# Altium PCB PCB1.PcbDoc
Units mil, origin at the board's own origin, x right, y up, seen from the top; angles counter-clockwise.
Board outline 3070.03 x 2140.03 mil, 2 copper layers (Top Layer, Bottom Layer); 35 components, 33 nets, 154 pads, 26 vias.
Unrouted connection lines stored in the file: 1.
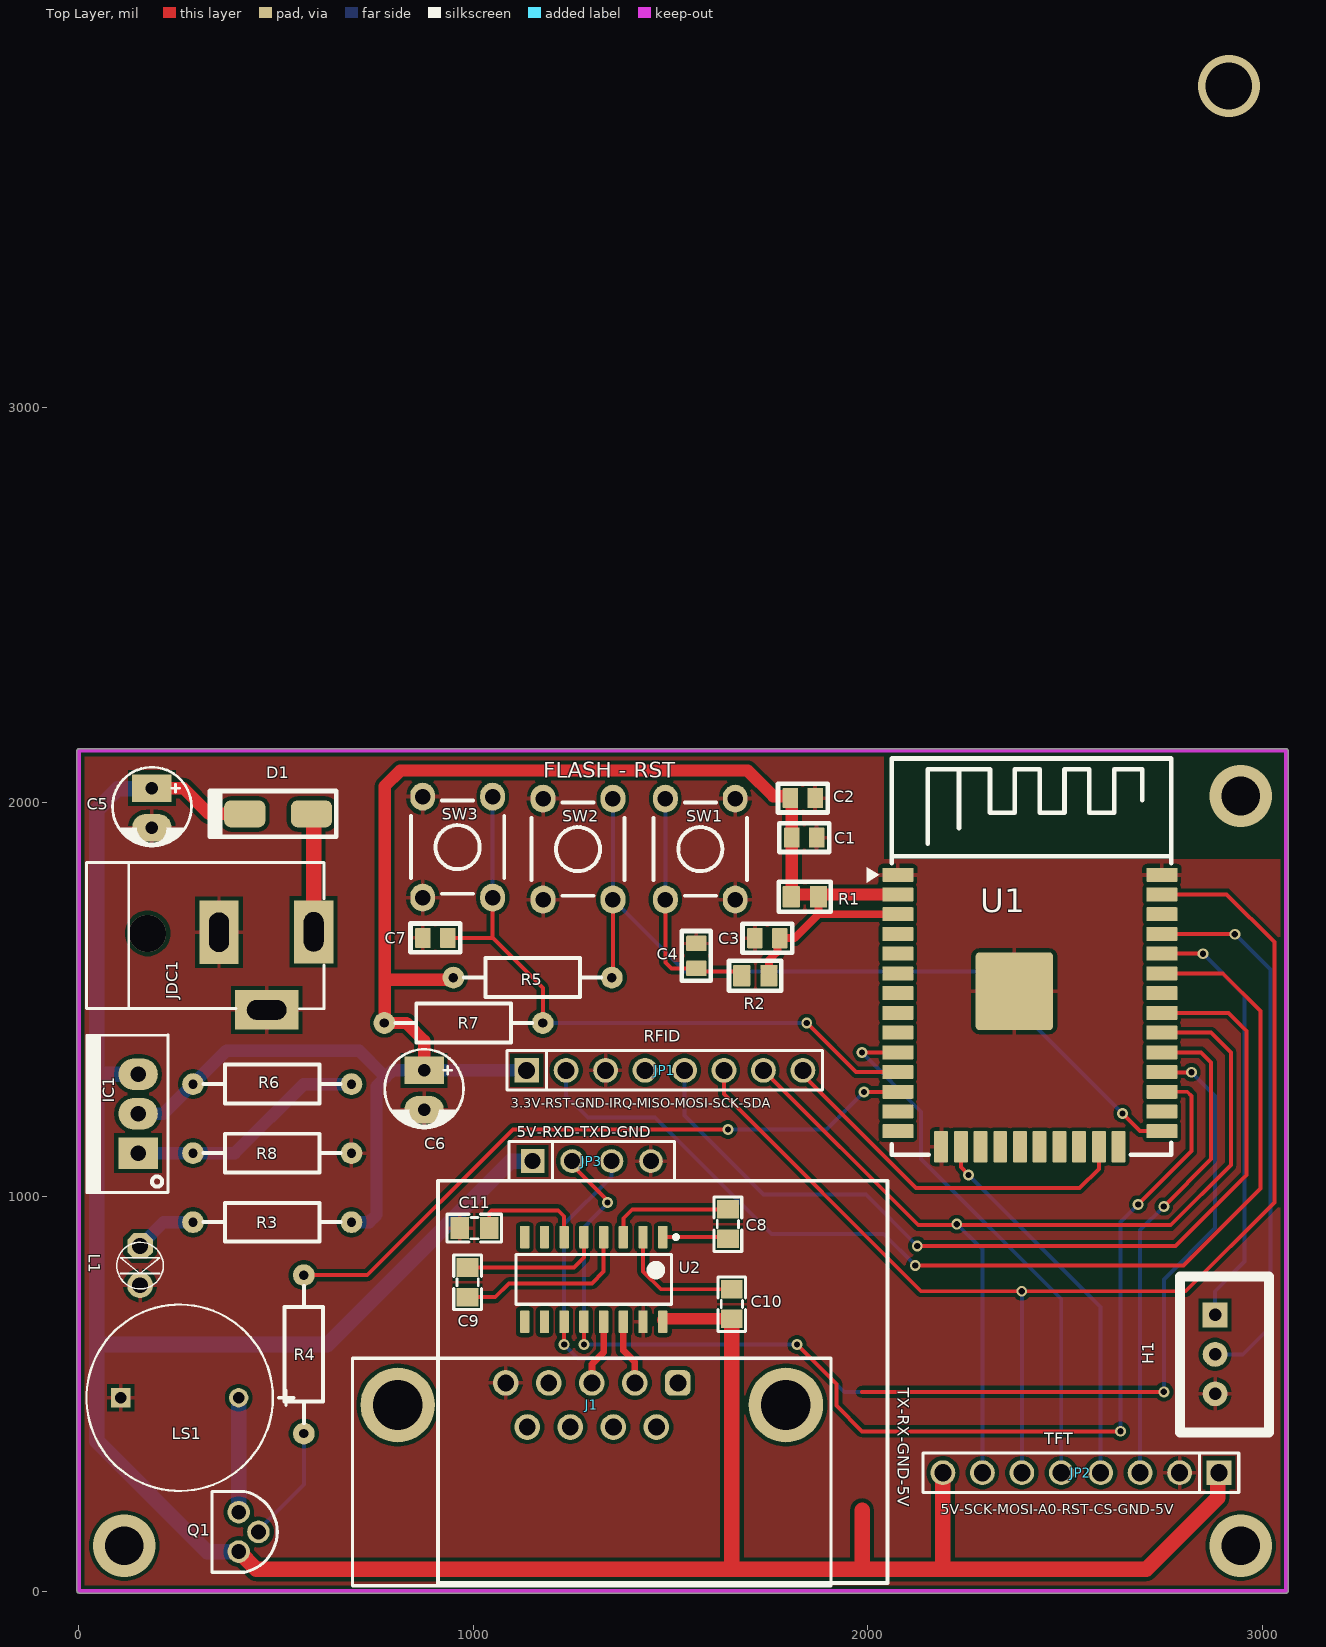
[diagram p0: Top Layer view]
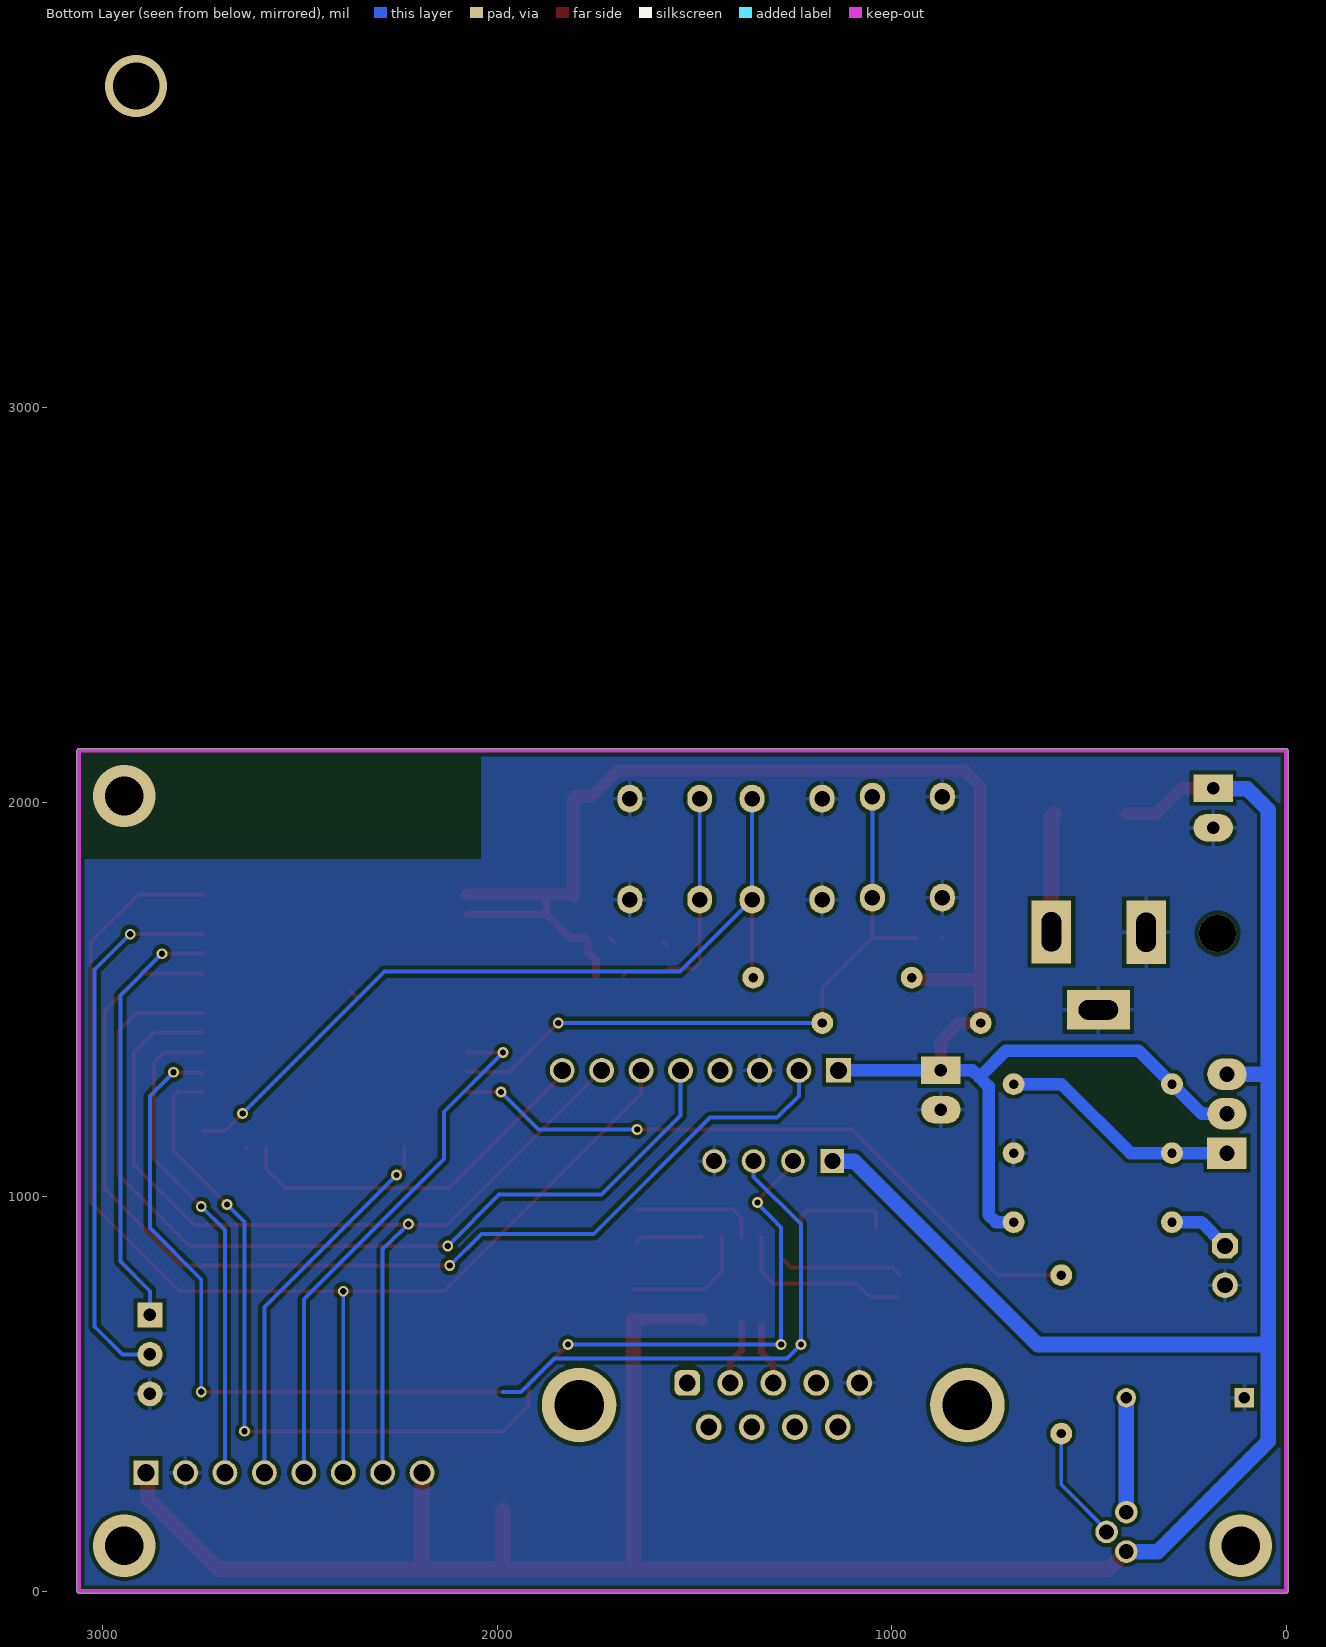
[diagram p1: Bottom Layer view, seen from below]
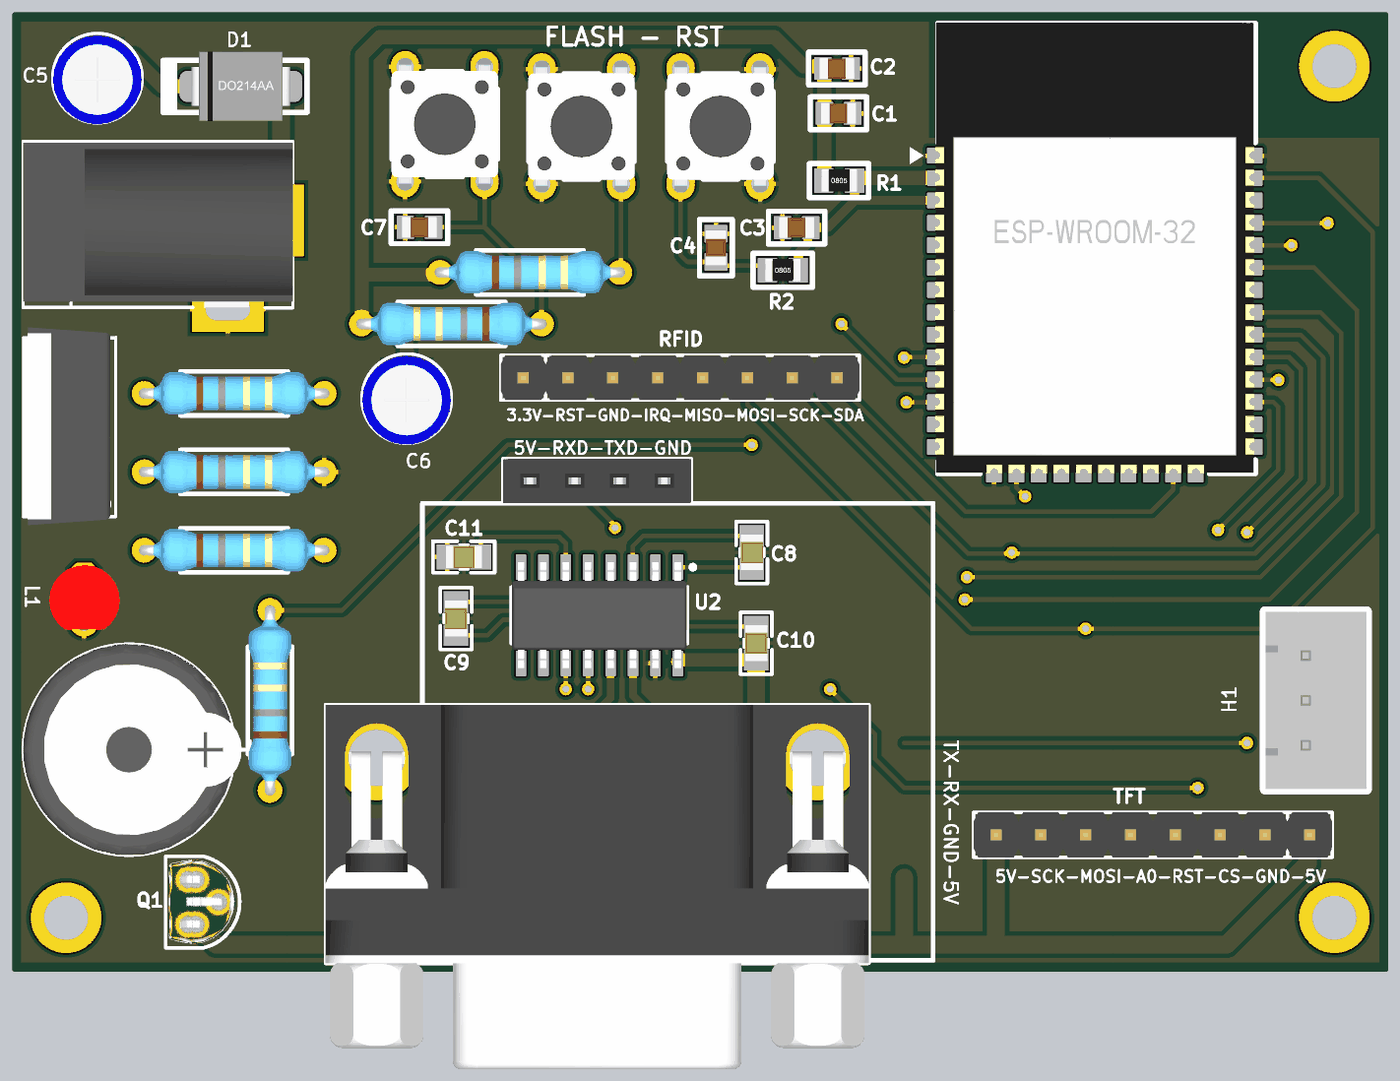
[diagram p2: 3D render of the assembled board from above, using the file's embedded part models]

## Layer stack, top to bottom
Top Solder: solder mask 0.4, Solder Resist, Dk 3.5
Top Layer: signal copper 1.4
Dielectric 1: dielectric 12.6, FR-4, Dk 4.8
Bottom Layer: signal copper 1.4
Bottom Solder: solder mask 0.4, Solder Resist, Dk 3.5

## Board outline
-5.01,0 -5.02,2130 cw(c0,2130) 0,2135.02 3060,2135.02 cw(c3060,2130) 3065.02,2130 3065.02,0 cw(c3060,0) 3060,-5.01 0,-5.01 cw(c0,0)

## Design rules (kind name [scope] priority, off if disabled: settings)
Clearance [All] p1: gap=10 ignorepadtopadclearanceinfootprint=FALSE
PolygonConnect [All] p1: connectstyle=Relief reliefconductorwidth=10 reliefentries=4 polygonreliefangle="90 Angle" airgapwidth=10
RoutingVias [All] p1: holewidth=28 width=50 viastyle="Through Hole" minholewidth=28 minwidth=50 maxholewidth=28 maxwidth=50
SolderMaskExpansion [All] p1: expansion=4 istentingtop=FALSE
SupplyNets "Schematic Supply Nets_4" [InNet('GND')] p1: voltage=0.000
SupplyNets "Schematic Supply Nets_1" [InNet('5V')] p2: voltage=0.000
SupplyNets "Schematic Supply Nets" [InNet('3.3V')] p3: voltage=0.000
Width [All] p1: maxlimit=10 minlimit=10 preferedwidth=10
30 further rules are at their usual default settings.

## Components (designator, comment, footprint, x,y, rotation, side; value= is the part's Value field where it differs from the comment)
C1 "22uF/25V/C0805/10%" CAP_CERA_C2012(CC0805INCH) 1838.5,1910 r180 top
C2 "0.1uF/25V/C0805/10%" CAP_CERA_C2012(CC0805INCH) 1835,2010 r180 top
C3 "4.7uF/25V/C0805/10%" CAP_CERA_C2012(CC0805INCH) 1745,1655 r0 top
C4 "10uF/25V/C0805/10%" CAP_CERA_C2012(CC0805INCH) 1565,1610 r90 top
C5 "0.1uF" CP1/2 185,2035 r270 top value=10uF/50V
C6 "1uF" CP1/2 875,1320 r270 top value=10uF/50V
C7 "10uF/25V/C0805/10%" CAP_CERA_C2012(CC0805INCH) 903.5,1655.63 r180 top
C8 "104" "tu 0805" 1645,930 r90 top
C9 "104" "tu 0805" 985.13,782.77 r270 top
C10 "104" "tu 0805" 1654.87,727.43 r90 top
C11 "104" "tu 0805" 1002.43,920.13 r0 top
D1 "SS34" SS14 505,1970 r180 top
H1 "Header 3P 2.54" XH2.54M-3 2880,700 r270 top
IC1 "LM317" QTO-220 150,1110 r90 top
J1 "618009231321" 618009231321 1300,300 r0 top
JDC1 "Jac DC 5V" DC-IN 595,1671 r0 top value="Jac DC"
JP1 "JP 1x8 2.54" "JP 1x8 DT" 1135,1320 r0 top
JP2 "JP 1x8 2.54" "JP 1x8 DT" 2890,300 r180 top
JP3 "JP 1x4 2.54" "JP 1x4 CT" 1150,1090 r0 top
L1 "LED 3mm" LED-3MM-RED 155,875 r270 top
LS1 "Buzzer 12095" FP-MCKPX-G1203A-K4056-MFG 255.39,490 r0 top
Q1 "SS8050DBU" FP-135AN-MFG 419.96,150 r180 top
R1 "10K/R0805/1%" "Res 0805 SMD" 1840,1760 r0 top
R2 "0k/R0805/1%" "Res 0805 SMD" 1714.45,1560 r0 top
R3 "220R" "tro vach 1/4w" 490,935 r180 top
R4 "220R" "tro vach 1/4w" 570,600 r270 top
R5 "10K" "tro vach 1/4w" 1150,1555 r180 top
R6 "330R" "tro vach 1/4w" 490,1285 r180 top
R7 "10K" "tro vach 1/4w" 975,1440 r0 top
R8 "560R" "tro vach 1/4w" 490,1110 r180 top
SW1 "Button" SW/4/06MM 1575,1880.63 r180 top
SW2 "Button" SW/4/06MM 1265,1880.63 r180 top
SW3 "Button" SW/4/06MM 960,1885.63 r0 top
U1 "ESP-WROOM-32" "ESP32 WROOM" 2075.71,1815.63 r0 top
U2 "MAX3232" D0016A_N 1305,790 r270 top

## Footprints (in the part's own frame and the unit in brackets; to place one, negate y for a bottom-side part, rotate by r counter-clockwise, add the part's x,y. Pads: shape width x height; smd on the part's side, far side on the other; paste and mask are expansions set on the pad)
618009231321 [mm] "9 pins, right angled, 10.3mm, with hex screw"
  rrect50% 1.65x1.65 hole 1.09: 1(5.54,5.78)
  round 1.65 hole 1.09: 2(2.77,5.78) 3(0,5.78) 4(-2.77,5.78) 5(-5.54,5.78) 6(4.155,2.94) 7(1.385,2.94) 8(-1.385,2.94) 9(-4.155,2.94)
  round 4.8 hole 3.2: M1(-12.495,4.36) M2(12.495,4.36)
  silkscreen extent -15.4,-7.28 15.4,7.37, body extent -15.41,-13.28 15.41,7.37, height 12.57
CAP_CERA_C2012(CC0805INCH) [mm] "Chip Capacitor, 2-Leads, Body 2.0x1.3mm, IPC Medium Density"
  rrect10% 1x1.3 smd: 1(-0.8,0) 2(0.8,0)
  silkscreen extent -1.6,-0.93 1.6,0.93, body extent -1,-0.6 1,0.6, height 0.95
CP1/2 [mil] "Tu hoa < 22uF/16>50V"
  rect 70x100 hole 32: 1(0,0)
  oval 70x100 hole 32: 2(100,0)
  silkscreen extent -53,-100 146,100, body extent -49,-99 149,99, height 287
D0016A_N [mm] "SOIC, 16-Leads, Body 10x4mm, Pitch 1.27mm, IPC Medium Density"
  rrect17% 1.45x0.6 smd: 1(-2.725,4.445) 2(-2.725,3.175) 3(-2.725,1.905) 4(-2.725,0.635) 5(-2.725,-0.635) 6(-2.725,-1.905) 7(-2.725,-3.175) 8(-2.725,-4.445) 9(2.725,-4.445) 10(2.725,-3.175) 11(2.725,-1.905) 12(2.725,-0.635) 13(2.725,0.635) 14(2.725,1.905) 15(2.725,3.175) 16(2.725,4.445)
  silkscreen extent -2.85,-5 1.6,5.42, body extent -3,-4.95 3,4.95, height 1.59
DC-IN [mil] "Jac DC input"
  rect 100x160 hole 50 slot 100 at 90 deg: 1(0,0) 2(-240,-1)
  rect 160x100 hole 50 slot 100 at 0 deg: 3(-119,-198)
  silkscreen extent -576,-195 26,176, body extent -576,-195 26,173, height 434
"ESP32 WROOM" [mm] "ESP32 WROOM"
  rrect10% 2x0.9 smd: 1(0,0) 2(0,-1.27) 3(0,-2.54) 4(0,-3.81) 5(0,-5.08) 6(0,-6.35) 7(0,-7.62) 8(0,-8.89) 9(0,-10.16) 10(0,-11.43) 11(0,-12.7) 12(0,-13.97) 13(0,-15.24) 14(0,-16.51) 25(17,-16.51) 26(17,-15.24) 27(17,-13.97) 28(17,-12.7) 29(17,-11.43) 30(17,-10.16) 31(17,-8.89) 32(17,-7.62) 33(17,-6.35) 34(17,-5.08) 35(17,-3.81) 36(17,-2.54) 37(17,-1.27) 38(17,0)
  rrect10% 0.9x2 smd: 15(2.785,-17.51) 16(4.055,-17.51) 17(5.325,-17.51) 18(6.595,-17.51) 19(7.865,-17.51) 20(9.135,-17.51) 21(10.405,-17.51) 22(11.675,-17.51) 23(12.945,-17.51) 24(14.215,-17.51)
  rrect10% 5x5 smd: 39(7.5,-7.5)
  silkscreen extent -2,-18.02 17.6,7.49, body extent -0.54,-18.02 17.54,7.52, height 3
FP-135AN-MFG [mm]
  round 1.45 hole 0.95 paste-2539.97 mask+0: 1(0.38,-1.27) 2(-0.89,0) 3(0.38,1.27)
  silkscreen extent -2.1,-2.6 2.1,2.6, body extent -2.19,-2.7 2.19,2.7, height 0.25
FP-MCKPX-G1203A-K4056-MFG [mm]
  rect 1.25x1.25 hole 0.75 paste-2539.97 mask+0: 1(-3.8,0)
  round 1.25 hole 0.75 paste-2539.97 mask+0: 2(3.8,0)
  silkscreen extent -6,-6 7.35,6, body extent -6.1,-6.1 6.1,6.1, height 0.25
"JP 1x4 CT" [mm]
  rect 1.52x1.52 hole 1.02: 1(0,0)
  round 1.52 hole 1.02: 2(2.54,0) 3(5.08,0) 4(7.62,0)
  silkscreen extent -1.52,-1.27 9.14,1.27, body extent -1.52,-1.25 9.14,1.25, height 8.51
"JP 1x8 DT" [mm] "8 pins, 1 row, straight, gold plating"
  rect 1.6x1.6 hole 1.1: 1(0,0)
  round 1.6 hole 1.1: 2(2.54,0) 3(5.08,0) 4(7.62,0) 5(10.16,0) 6(12.7,0) 7(15.24,0) 8(17.78,0)
  silkscreen extent -1.27,-1.27 19.05,1.27, body extent -1.27,-1.27 19.05,1.27, height 8.54
LED-3MM-RED [mil]
  oct 65x65 hole 40: 1(0,0)
  round 65 hole 40: 2(100,0)
  silkscreen extent -9,-59 109,59, body extent -27,-77 117,80, height 181
QTO-220 [mil] "TO-220 - 1-2-3"
  rect 80x100 hole 39: 1(0,0)
  oval 80x100 hole 39: 2(100,0) 3(200,0)
  silkscreen extent -100,-76 300,130, body extent -119,-64 322,121, height 755
"Res 0805 SMD" [mm] "Reflow Soldering"
  rrect10% 1.1x1.4 smd mask+0.1: 1(-0.875,0) 2(0.875,0)
  silkscreen extent -1.69,-0.97 1.67,0.96, body extent -1,-0.63 1,0.63, height 0.62
SS14 [mm] "Diode SMD"
  rrect50% 2.65x1.75 smd: 1(-2.15,0) 2(2.15,0)
  silkscreen extent -3.75,-1.48 4.4,1.48, body extent -2.79,-1.98 2.79,1.97, height 2.6
SW/4/06MM [mm]
  oval 1.6x1.8 hole 1: 1(-2.25,3.25) 2(-2.25,-3.25) 3(2.25,-3.25) 4(2.25,3.25)
  silkscreen extent -3,-3 3,3, body extent -3.01,-3.87 3.02,3.87, height 5.01
"tro vach 1/4w" [mm]
  round 1.4 hole 0.6: 1(-5.1,0) 2(5.1,0)
  silkscreen extent -4.39,-1.25 4.42,1.25, body extent -5.38,-1.2 5.38,1.2, height 2.41
"tu 0805" [mm] "Compoment SMD 80x50mil"
  rect 1.2x1.4 smd: 1(-0.946,-0.003) 2(0.954,-0.003)
  silkscreen extent -1.75,-0.89 1.75,0.89, body extent -1.01,-0.64 1.01,0.63, height 0.61
XH2.54M-3 [mm]
  rect 1.6x1.6 hole 0.8: 1(0,0)
  round 1.6 hole 0.8: 2(2.54,0) 3(5.08,0)
  silkscreen extent -2.48,-2.26 7.56,3.46, body extent -2.48,-2.26 7.56,3.48, height 6.91

## Part data
C1: library part 0.1uF/50V/C0603/10%, "22µF ±20% 25V Ceramic Capacitor X5R 0805 (2012 Metric)", Manufacturer="Tariff Applied", ComponentLink1Description=http://www.murata.com/~/media/webrenewal/support/library/catalog/products/capacitor/mlcc/c02e.ashx, ComponentLink1URL=http://www.murata.com/~/media/webrenewal/support/library/catalog/products/capacitor/mlcc/c02e.ashx, Digikey=1276-2908-1-ND
C2 C3 C4 C7: library part 0.1uF/50V/C0603/10%, "0.1µF ±10% 25V Ceramic Capacitor X7R 0805 (2012 Metric)", ComponentLink1Description=http://www.murata.com/~/media/webrenewal/support/library/catalog/products/capacitor/mlcc/c02e.ashx, ComponentLink1URL=http://www.murata.com/~/media/webrenewal/support/library/catalog/products/capacitor/mlcc/c02e.ashx, Digikey=478-3755-1-ND
C5 C6: library part CP1, "Cap P  0,1uF < 22uF , 16 - 50V", Description 1="10 => 220uF/6,3V/10V - 10uF => 100uF/16V", Description 2="0,1uF => 33uF/50V - 10uF => 22uF/63V", Description 3="0,47uF => 10uF/100V"
C8 C9 C10 C11: library part "Tu 0805 104 50V 10%", "Dán", Chung_Loai=Dán, Don_Vi=Con, Ma_Hang=MH004551, So_Chan=2, Ten_Linh_Kien="Tụ 0805 104-100nF 10% 50V"
D1: library part "D Schottky", "Schottky Diode", Code_JEDEC=DO-214-AA, LatestRevisionDate=17-Jul-2002, LatestRevisionNote="Re-released for DXP Platform.", PackageDescription="DO-214-AA/SMB; 2 C-Bend Leads; Body 5.3 x 3.6 mm, inc. leads (LxW)", PackageReference=SMB, Published=8-Jun-2000, Publisher="Altium Limited"
H1: library part "Header 3P 2.54 Duc Thang", "Cắm", Chung_Loai=Cắm, Don_Vi=Con, Ma_Hang=MH001292, Ten_Linh_Kien="Header 3P XH2.54-3P Đực Thẳng"
IC1: "Adj Voltage +1.2 -> +37V"
J1: library part CMP-1502-00204-2, Contact Resistance=30mΩ, Current Rating=3A, Insulation Resistance=5GΩ, Max Operating Temperature=105°C, Min Operating Temperature=-55°C, Operating Supply Voltage=125V, Contact Plating=Gold, Depth=20.75mm, Gender=Female, Housing Material=Steel, Insulation Material=PBT, Lead Free="Lead Free", Length=16.34mm, Mount="Through Hole", NexarPartId=12259390, Number of Contacts=9, Number of Pins=9, Number of Rows=2, Orientation="Right Angle", Pitch=2.77mm, REACH SVHC=Unknown, RoHS=Compliant, Termination=SMD/SMT, Voltage Rating=125V, Width=12.5mm
JDC1: library part DCIN, "Jac DC input"
JP1 JP2: library part "JP 1x8 2.54 Duc Thang", "Cắm", Chung_Loai=Cắm, Don_Vi=Con, Ma_Hang=MH000903, Ten_Linh_Kien="Jump Đơn Đực 2.54MM 1x40P Thẳng 11MM"
JP3: library part "JP 1x4 2.54 Cai Thang", "Cắm", Chung_Loai=Cắm, Don_Vi=Con, Ma_Hang=MH004006, Ten_Linh_Kien="Jump Đơn Cái 2.54MM 1x20P Thẳng"
L1: library part "LED 3mm Do", "Cắm", Chung_Loai=Cắm, Don_Vi=Con, Ma_Hang=MH003892, Ten_Linh_Kien="Led 3MM Phủ Đỏ (10c)"
LS1: library part CMP-12433-000001-1, "MAGNETIC BUZZER AND TRANSDUCER - More Details", Current=30mA, Frequency=2300Hz, Manufacturer="Multicomp Pro", Manufacturer Part Number=MCKPX-G1203A-K4056, Max Supply Voltage=5V, Min Supply Voltage=2V, Operating Supply Voltage=3V, PACKAGE=0, Temperature="-20°C to +70°C", Temperature Range High=+70°C, Temperature Range Low=-20°C, Automotive=No, Category=Speak, ComponentLink2Description=Datasheet, ComponentLink2URL=http://www.farnell.com/datasheets/1498149.pdf?_ga=2.17855225.1157923166.1572356775-536200964.1569240579, Device Class L1=Electromechanical, Device Class L2="Audio Products", Device Class L3=Buzzers, Height=9.5mm, Lead Free=Yes, Octopart=https://octopart.com/mckpx-g1203a-k4056-multicomp-12157154, RoHS=TRUE, Standoff Height=0.5mm
Q1: library part CMP-00278-84331634-1, "SS8050DBU Bipolar (BJT) Single Transistor, NPN, 25 V, 100 MHz, 1 W, 1.5 A, 160", Case/Package=TO-92, Collector Base Voltage (VCBO)=40V, Collector Emitter Breakdown Voltage=25V, Collector Emitter Saturation Voltage=500mV, Current Rating=1.5A, Emitter Base Voltage (VEBO)=6V, Frequency=100MHz, Manufacturer Lifecycle Status=ACTIVE, Max Junction Temperature (Tj)=150°C, Max Power Dissipation=1W, Min Operating Temperature=-65°C, Output Power=2W, Collector Emitter Voltage (VCEO)=25V, Element Configuration=Single, Gain Bandwidth Product=100MHz, Height=4.58mm, hFE Min=85, Lead Free="Lead Free", Length=4.58mm, Lifecycle Status=Production, Max Collector Current=1.5A, Max Frequency=100MHz, Max Operating Temperature=150°C, Mount="Through Hole", NexarPartId=84331634, Number of Elements=1, Number of Pins=3, Packaging=Bulk, Polarity=NPN, Power Dissipation=1W, Radiation Hardening=No, REACH SVHC="No SVHC", RoHS=Compliant, Schedule B="8541290080, 8541290080|8541290080|8541290080|8541290080|8541290080", Transition Frequency=100MHz, Voltage Rating (DC)=25V, Weight=179mg, Width=3.86mm
R1: library part 200K/R0603/1%, "10 kOhms ±1% 0.125W, 1/8W Chip Resistor 0805 (2012 Metric) Thick Film", Operating Temperature="-55°C ~ 155°C", Package / Case="0603 (1608 Metric)", Power (Watts)="0.1W, 1/10W", Supplier Device Package=0603, Category=Resistors, ComponentLink1Description=http://www.yageo.com/documents/recent/PYu-RC_Group_51_RoHS_L_7.pdf, ComponentLink1URL=http://www.yageo.com/documents/recent/PYu-RC_Group_51_RoHS_L_7.pdf, Digikey=A126332CT-ND, Failure Rate=-, Features="Moisture Resistant", Height - Seated (Max)="0.022\" (0.55mm)", Part Status=Active, RoHS="RoHS Compliant", Size / Dimension="0.063\" L x 0.031\" W (1.60mm x 0.80mm)"
R2: library part 200K/R0603/1%, "0 Ohms Jumper 0.125W, 1/8W Chip Resistor 0805 (2012 Metric) Automotive AEC-Q200 Thick Film", ComponentLink1Description=http://www.yageo.com/documents/recent/PYu-RC_Group_51_RoHS_L_7.pdf, ComponentLink1URL=http://www.yageo.com/documents/recent/PYu-RC_Group_51_RoHS_L_7.pdf, Digikey=541-0.0ACT-ND, Failure Rate=-, Height - Seated (Max)="0.022\" (0.55mm)", Part Status=Active
R3 R4 R5 R6 R7 R8: library part "Tro Vach 1/4W 5% 220R", "Cắm", Chung_Loai=Cắm, Don_Vi=Con, Ma_Hang=MH007300, So_Chan=2, Ten_Linh_Kien="Trở Vạch 1/4w 5% 220R"
SW1 SW2 SW3: library part "SW SPST 4-pin", "Tact switch 4-pin"
U1: "ESP-WROOM-32 (8MB), WIFI MODULE 64 MBITS SPI FLASH", Digikey=1904-1019-1-ND
U2: library part CMP-0299-00792-2, "3-V to 5.5-V Multichannel RS-232 Line Driver / Receiver with ±15-kV IEC ESD Protection, -40 to 85 degC, 16-Pin SOIC (D), Green (RoHS & no Sb/Br)", Drivers Per Package=2, Supply Voltage(s)(V)="3.3 or 5.0", ComponentLink1Description="Manufacturer URL", ComponentLink1URL=www.ti.com, ComponentLink2Description=Datasheet, ComponentLink2URL=http://www.ti.com/general/docs/lit/getliterature.tsp?genericPartNumber=MAX3232E&fileType=pdf, ComponentLink3Description="Package Specification", ComponentLink3URL=http://www.ti.com/litv/pdf/mpds178g, DatasheetVersion=SLLS664A, ESD HBM(kV)=+/-15, ICC(Max)(mA)=1, IEC-61000-4-2 SUPPORT=TRUE, PackageDescription="16-Pin Plastic Small Outline Integrated Circuit, 9.9 x 3.9 mm, Pitch 1.27 mm Pitch", PackageReference=D0016A, PackageVersion="revM, Jun-2011", Receivers Per Package=2, RS-232=TRUE, Single Supply=TRUE, SubFamily=RS-232

## Via types
v1: diameter 27.56, hole 15.75, Top Layer to Bottom Layer, 21 vias
v2: diameter 157.48, hole 98.43, Top Layer to Bottom Layer, 3 vias
v3: diameter 94.49, hole 94.49, Top Layer to Bottom Layer, 1 vias
v4: diameter 157.48, hole 118.11, Top Layer to Bottom Layer, 1 vias

## Nets (pads, with @x,y where several pads share a name; then routed paths per layer and width w, separated by ;. In a path a pad name is that pad's centre, name@x,y a point inside that pad or via, vN(x,y) a via of type N, cw(c..) or ccw(c..) an arc to the next point about the centre after c; other vN are vias at no path point)
3.3V: C1.2 C2.2 C6.1 IC1.2 JP1.1 R1.1 R3.1 R5.2 R6.2 R7.1 U1.2 | length 4062
  Top Layer w10: R1.1 R1.1@1807.01,1761.46
  Top Layer w31.5: R7.1 R7.1@775,1440 ; R7.1@775,1439.21 R7.1@775,1440 ; C6.1 875,1395 830,1440 R7.1@775,1440 ; R5.2@957.31,1550 775,1550 ; C2.2 1803.5,2010.78 1799.57,2014.72 1760.28,2014.72 1695,2080 815,2080 775,2040 775,1550 ; R1.1@1807.01,1761.46 C1.2 1807.01,1940 1807.01,1965.63 C2.2@1807.01,2010 ; R1.1@1822.01,1765.63 U1.2 ; R7.1@775,1440 775,1550
  Bottom Layer w31.5: IC1.2 214.21,1210 R6.2 374.21,1370 710,1370 770,1310 ; R3.1 735.76,935 754.21,953.45 754.21,1279.21 777.5,1302.5 795,1320 C6.1 JP1.1
5V: C5.1 C10.1 D1.2 IC1.3 JP2.1 JP2.8 JP3.1 Q1.3 U2.16 | length 7721.5
  Top Layer w10: D1.2@402.64,1970 D1.2
  Top Layer w30: U2.16@1480,687.01 1483.19,690.2 C10.1
  Top Layer w31.5: C5.1 265,2035 330,1970 D1.2@402.64,1970
  Top Layer w39.37: Q1.3 450,55 1655,55 ; C10.1@1655,686.26 1655,55 ; 1985,205 1985,55 ; 2190,70 JP2.8 ; JP2.1 2886.12,296.12 2886.12,236.12 2705,55 2190,55 2105,55 1985,55 ; 1655,55 1985,55
  Bottom Layer w39.37: 50,1310 IC1.3 ; C5.1 184.01,2034.01 99.01,2034.01 45,1980 45,625 ; Q1.3@400.04,100 325,100 45,380 45,625 ; JP3.1 1095,1090 630,625 45,625
A0: JP2.5 U1.10 | length 1381
  Top Layer w10: v1@1975.63,1365.63 U1.10 U1.10@2071.34,1370
  Bottom Layer w10: v1(1985,1365) 2135,1215 2135,1095 2490,740 JP2.5@2490,299.39
BUZZER: R4.1 U1.12 | length 1698.3
  Top Layer w10: R4.1 730.79,800.79 1100,1170 v1(1645,1170) ; v1(1990,1265) 2075.08,1265 U1.12
  Bottom Layer w10: v1(1645,1170) 1895,1170 v1(1990,1265)
EN: C3.2 R1.2 R2.2 U1.3 | length 473.5
  Top Layer w10: C3.2@1770.27,1648.77 C3.2
  Top Layer w20: R2.2 1748.9,1598.9 1770.27,1620.27 C3.2@1770.27,1648.77 ; C3.2 1813.82,1655 1874.45,1715.63 R1.2 ; 1876.05,1715.63 U1.3
G5/CS: JP2.3 U1.29 | length 1248.9
  Top Layer w10: U1.29 2844.37,1365.63 2870,1340 2870,1095 v1(2750,975)
  Bottom Layer w10: JP2.3@2690,301.25 2690,915 v1(2750,975)
GND: C1.1 C2.1 C3.1 C4.2 C5.2 C6.2 C7.2 C11.1 H1.3 J1.5 JDC1.2 JDC1.3 JP1.3 JP2.2 JP3.4 L1.2 LS1.1 R8.1 SW1.1 SW1.2 SW2.3 SW2.4 SW3.1 SW3.2 U1.1 U1.15 U1.38 U1.39 U2.15 | length 130.9
  Top Layer w10: JDC1.3 JDC1.3@485,1464 ; C7.2@871.42,1656.22 C7.2 ; C6.2 C6.2@890,1220 ; C4.2@1570,1636.5 C4.2@1578.5,1645 ; SW1.1 SW1.1@1677.66,1738.6 ; C3.1@1703.5,1645 C3.1 ; U1.39@2355,1504.37 U1.39
  Bottom Layer w10: JDC1.2@340,1655 JDC1.2 ; JDC1.3@470.86,1478.14 JDC1.3 ; R8.1@690.79,1105.79 R8.1 ; SW1.2 SW1.2@1664.29,2009.29
IO0: R5.1 SW2.1 SW2.2 U1.25 | length 2086.7
  Top Layer w10: R5.1@1353.58,1556.42 SW2.1 ; v1(2645,1210.63) 2690,1165.63 U1.25
  Bottom Layer w10: SW2.2 SW2.1 1536.26,1570 2285.63,1570 v1(2645,1210.63)
MISO: JP1.5 U1.31 | length 2362.2
  Top Layer w10: v1(2125,875) 2780,875 2960,1055 2960,1420 2914.37,1465.63 U1.31
  Bottom Layer w10: JP1.5@1535,1332.04 1535,1205 1735,1005 1995,1005 v1(2125,875)
MOSI: JP1.6 JP2.6 U1.37 | length 3210.3
  Top Layer w10: JP1.6 1635,1260 2135,760 v1(2390,760) 2805,760 3030,985 3030,1645 2909.37,1765.63 U1.37
  Bottom Layer w10: JP2.6 v1(2390,760)
NetC4_1: C4.1 R2.1 SW1.3 SW1.4 | length 622.5
  Top Layer w10: SW1.4 1486.42,1593.58 1501.5,1578.5 C4.1 1573.5,1570 1670,1570 R2.1
  Bottom Layer w10: SW1.4 SW1.3
NetC7_1: C7.1 R7.2 SW3.3 SW3.4 U1.11 | length 1691.6
  Top Layer w10: C7.1 1047.87,1655.63 1048.58,1656.34 ; SW3.3 1048.58,1656.34 ; R7.2 1175.79,1529.13 1048.58,1656.34 ; v1(1845,1440) 1969.37,1315.63 U1.11
  Bottom Layer w10: SW3.3 SW3.4 ; R7.2 v1(1845,1440)
NetC8_1: C8.1 U2.1 | length 170.1
  Top Layer w10: U2.1 1632.72,897.28 C8.1@1645,885
NetC8_2: C8.2 U2.3 | length 322.2
  Top Layer w10: U2.3 1380,945 1402.57,967.57 C8.2
NetC9_1: C9.1 U2.5 | length 362.8
  Top Layer w10: C9.1@980.13,802.57 C9.1@998.76,821.2 ; C9.1@1006.84,818.43 1008.42,820 1255,820 1280,845 U2.5
NetC9_2: C9.2 U2.4 | length 459.1
  Top Layer w10: C9.2 1055.2,745.2 1090,780 1300,780 1330,810 U2.4
NetC10_2: C10.2 U2.2 | length 330.9
  Top Layer w10: U2.2 1430,810 1475,765 C10.2
NetC11_2: C11.2 U2.6 | length 290.5
  Top Layer w10: C11.2 1040,959.14 1045.86,965 1215,965 1230,950 U2.6
NetD1_1: D1.1 JDC1.1 | length 301.2
  Top Layer w39.37: D1.1 595,1964.65 JDC1.1
NetIC1_1: IC1.1 R6.1 R8.2 | length 613.3
  Bottom Layer w31.5: IC1.1 R8.2 395,1110 570,1285 R6.1
NetJ1_2: J1.2 U2.14 | length 167.2
  Top Layer w17: U2.14 1380,610 1409.06,580.94 J1.2
NetJ1_3: J1.3 U2.13 | length 159.2
  Top Layer w17: J1.3 1300.28,527.84 1300.28,575.28 1330,605 U2.13@1330,674.35
NetL1_1: L1.1 R3.2 | length 152
  Bottom Layer w31.5: L1.1@160,880 215,935 R3.2
NetLS1_2: LS1.2 Q1.1 | length 292.1
  Bottom Layer w39.37: Q1.1@400.04,200 403.43,203.39 403.43,215.92 405,217.49 LS1.2
NetQ1_2: Q1.2 R4.2 | length 298.9
  Bottom Layer w10: Q1.2@450.04,150 570,269.96 R4.2
RESET: JP2.4 U1.16 | length 977.1
  Top Layer w10: U1.16 2235.35,1074.65 v1(2255,1055)
  Bottom Layer w10: v1(2255,1055) 2590,720 JP2.4@2590,296.1
RST: JP1.2 U1.33 | length 2823.5
  Top Layer w10: v1(2120,825) 2800,825 2995,1020 2995,1470 2899.37,1565.63 U1.33
  Bottom Layer w10: JP1.2 1235,1255 1290,1200 1460,1200 1755,905 2040,905 v1(2120,825)
"RX/PD1 TXD": JP3.3 U1.28 U2.11 | length 3110.2
  Top Layer w10: v1(1230,625) U2.11 ; 1985,505 v1(2750,505) ; U1.28 2750.63,1310 2755.63,1315 v1(2820,1315)
  Bottom Layer w10: JP3.3 1350,1050 1230,930 v1(1230,625) 1265,590 1855,590 1940,505 1985,505 ; v1(2750,505) 2750,790 2880,920 2880,1255 v1(2820,1315)
RXD0/USB_TX: H1.1 U1.34 | length 1094.8
  Top Layer w10: U1.34 v1(2849.37,1615.63)
  Bottom Layer w10: v1(2849.37,1615.63) 2955,1510 2955,835 2880,760 H1.1
SCK: JP1.7 JP2.7 U1.30 | length 2559.5
  Top Layer w10: JP1.7@1735,1328.17 JP1.7 2127.5,927.5 2222.5,927.5 v1(2225,930) 2227.5,927.5 2767.5,927.5 2920,1080 2920,1365 2869.37,1415.63 U1.30
  Bottom Layer w10: v1(2225,930) 2279.35,877.6 2279.41,877.54 2290,866.95 JP2.7
SDA: JP1.8 U1.23 | length 957.5
  Top Layer w10: JP1.8 1835,1307.81 2121.59,1021.22 2536.22,1021.22 2585.35,1070.35 U1.23
"TX/PD0 RXD": JP3.2 U1.27 U2.12 | length 3072.2
  Top Layer w10: JP3.2 1250,1079.75 1340,989.75 v1(1340,985) ; v1(1280,625) U2.12 ; v1(1820,625) 1920,525 1920,470 1985,405 v1(2640,405) ; v1(2685,980) 2820,1115 2820,1255 2809.37,1265.63 U1.27
  Bottom Layer w10: 1304.77,946.87 1280,922.09 v1(1280,625) v1(1820,625) ; 1304.8,946.87 1340,982.07 v1(1340,985) ; v1(2640,405) 2640,935 v1(2685,980)
TXD0/USB_RX: H1.2 U1.35 | length 1386.5
  Top Layer w10: U1.35 2745.63,1665 v1(2930,1665)
  Bottom Layer w10: H1.2 2950,600 3020,670 3020,1575 v1(2930,1665)
pads on no net: J1.1 J1.4 J1.6 J1.7 J1.8 J1.9 J1.M1 J1.M2 JP1.4 U1.4 U1.5 U1.6 U1.7 U1.8 U1.9 U1.13 U1.14 U1.17 U1.18 U1.19 U1.20 U1.21 U1.22 U1.24 U1.26 U1.32 U1.36 U2.7 U2.8 U2.9 U2.10
copper on no net: | length 0.5
  Top Layer w10: 2635,1125.91 2635.35,1126.26
  other v2: 115,115 2945,115 2945,2015
  other v3: 174,1667
  other v4: 2915,3815

## Polygon pours and split planes (outlines as drawn)
GND on Top Layer "GND_L01_P000" (solid, remove dead copper, pour order 0): 0,2130 2040,2130 2040,1855 3060,1855 3060,0 0,0
GND on Bottom Layer "GND_L02_P001" (solid, remove dead copper, pour order 1): 0,2130 2040,2130 2040,1855 3060,1855 3060,0 0,0

## Keep-outs
Keep-Out Layer:
  lines w10: 0,0 0,2130 3060,2130 3060,0 0,0

## Silkscreen, mask and mechanical layers (free items; w line width, h text height)
Top Overlay:
  lines w10: 910,20 2050,20 2050,1040 910,1040 910,20
  text "FLASH - RST" at 1177,2062 h40
  text "RFID" at 1432,1392 h30
  text "3.3V-RST-GND-IRQ-MISO-MOSI-SCK-SDA" at 1095,1225 h24
  text "5V-RXD-TXD-GND" at 1110,1150 h28
  text "TX-RX-GND-5V" at 2075,515 h30 r270
  text "TFT" at 2447,372 h30
  text "5V-SCK-MOSI-A0-RST-CS-GND-5V" at 2185,195 h26

## Text inside footprints (layer, text, board x,y; h text height)
U1: Mechanical 2 "38" at 2756.81,1793.78 h31.5 r90; Mechanical 2 "25" at 2756.81,1140.24 h31.5 r90; Mechanical 2 "24" at 2611.14,1124.49 h31.5; Mechanical 2 "15" at 2162.32,1124.49 h31.5; Mechanical 2 "14" at 2099.33,1148.11 h31.5 r90; Mechanical 2 "1" at 2099.33,1813.46 h31.5 r90